# Altium PCB 20bit_40MS_ADC_DIOT.PcbDoc (part 6 of 8)
Units mm, origin at the board's own origin, x right, y up, seen from the top; angles counter-clockwise.
Board outline 222.63 x 100.1 mm, 6 copper layers (L1, L2, L3, L4, L5, L6), stack 2.522 mm thick; 616 components, 374 nets, 2097 pads, 984 vias.
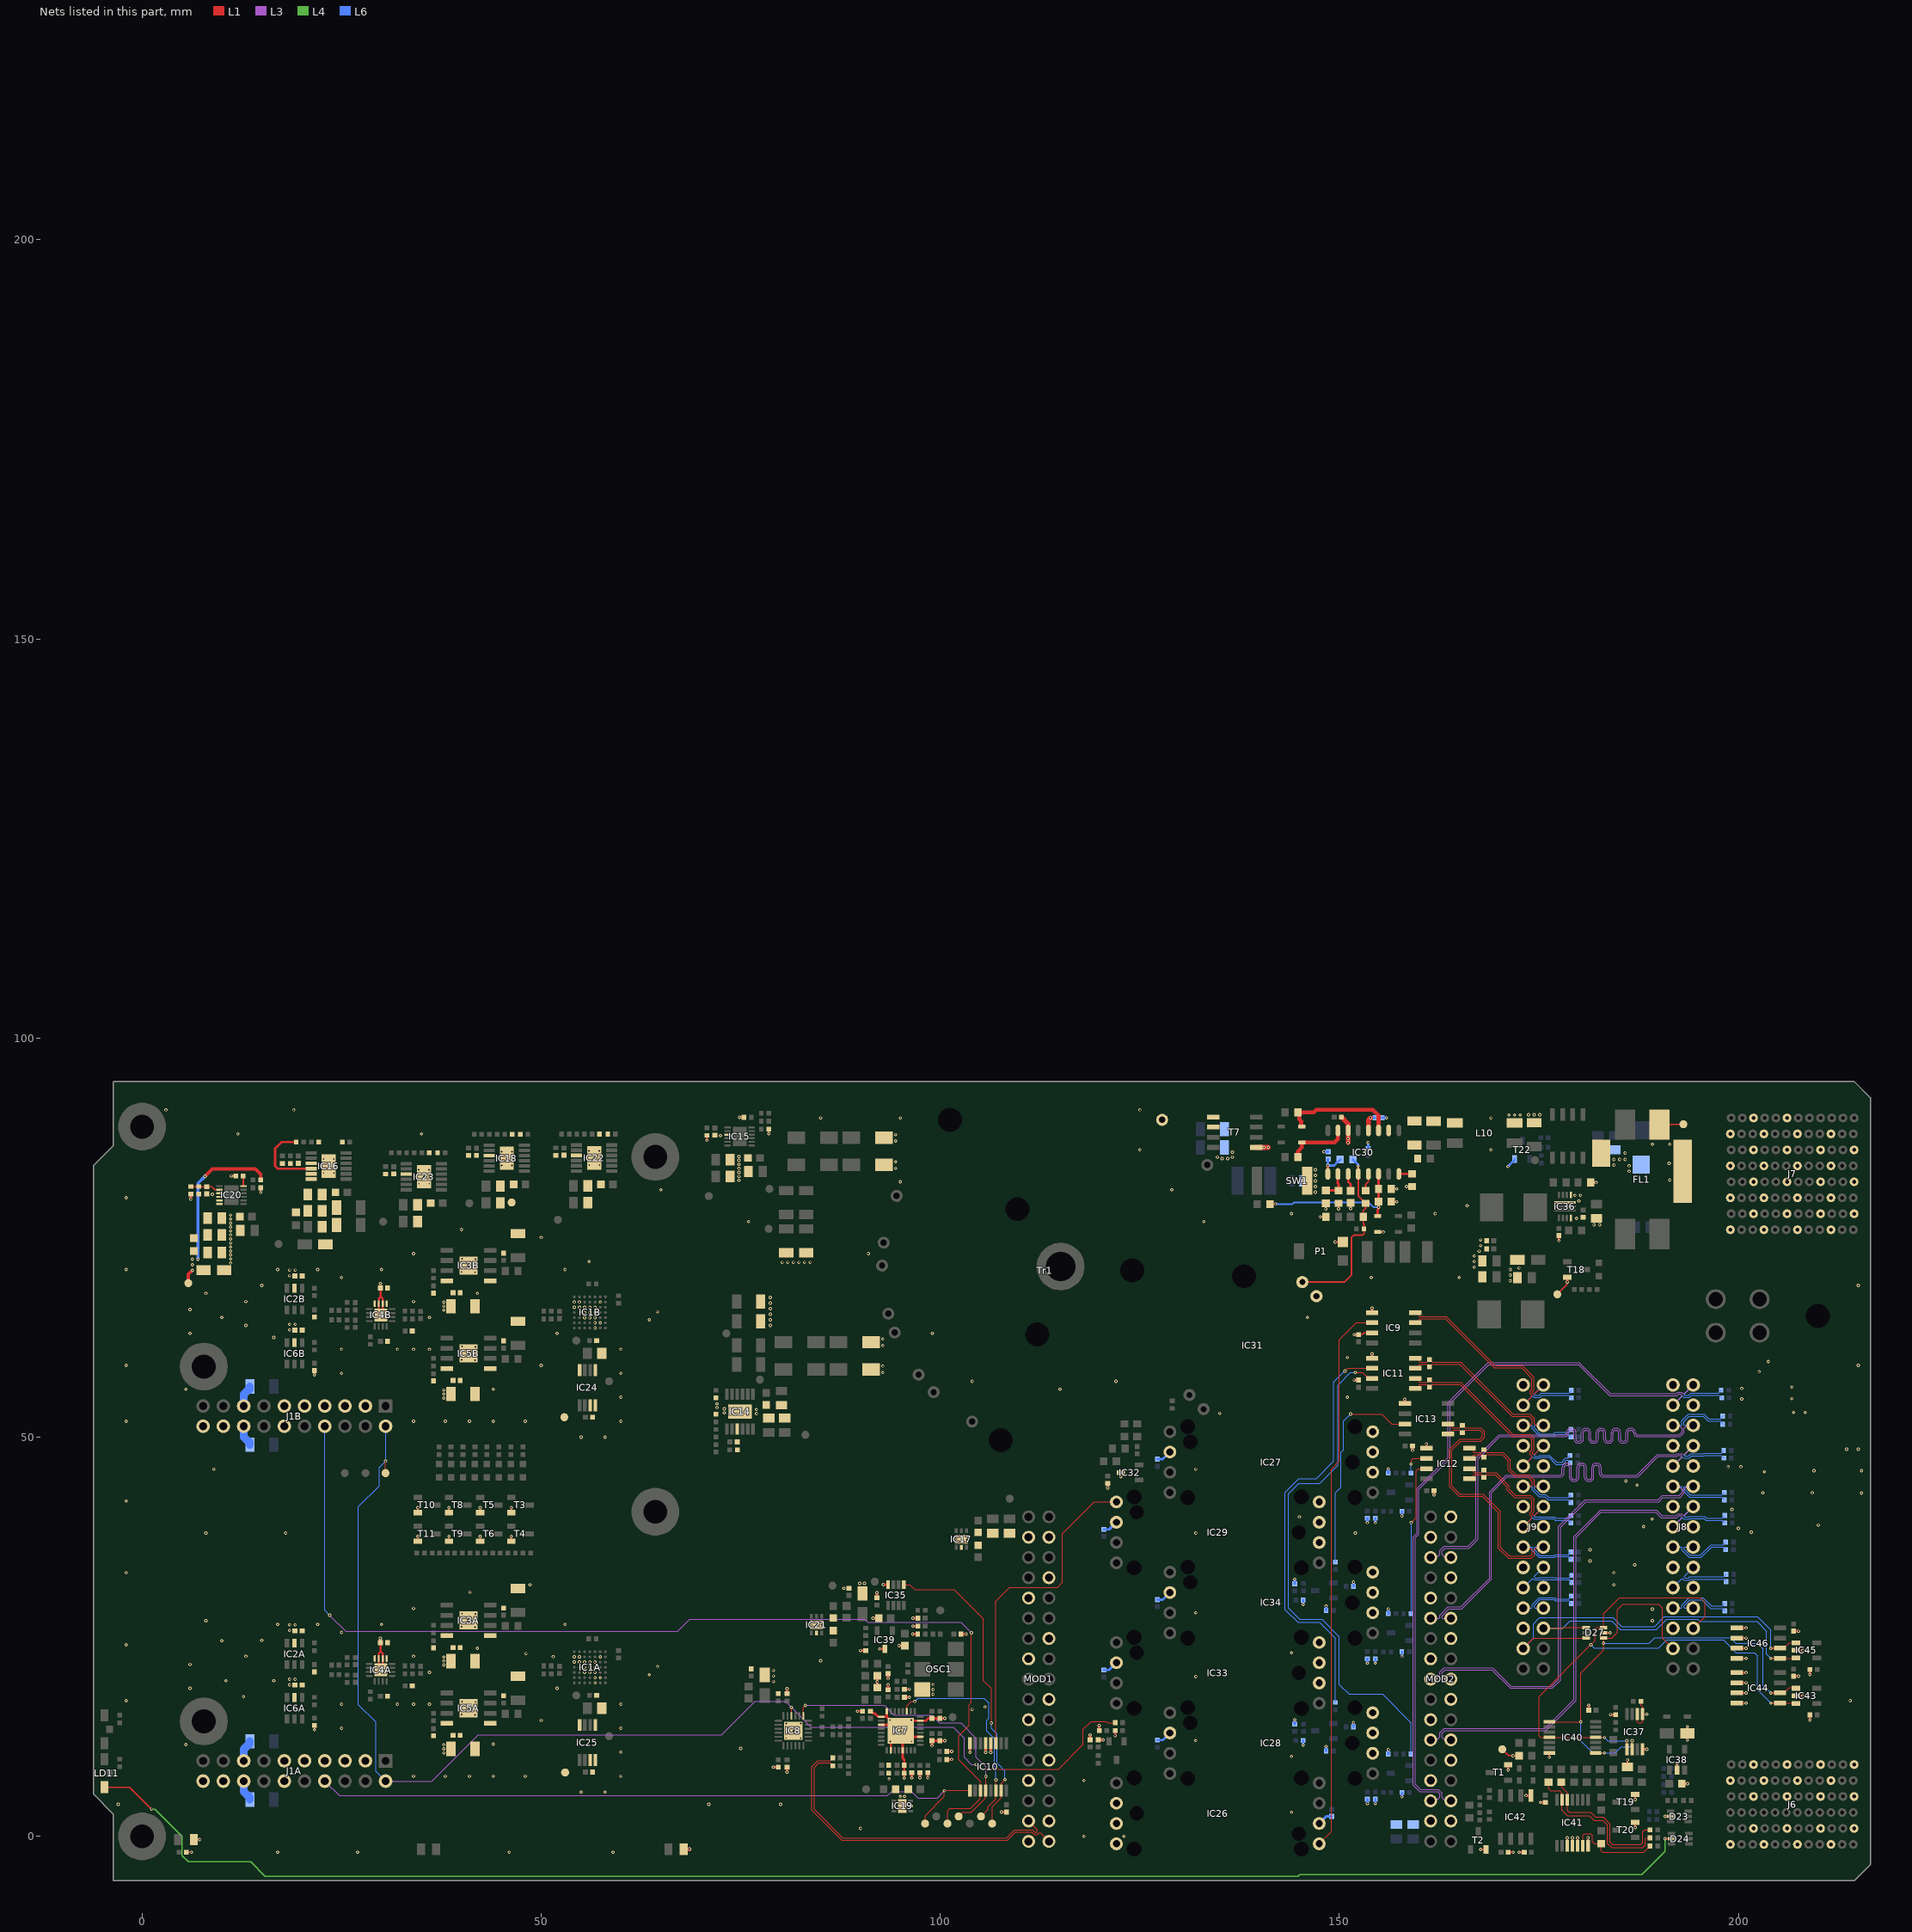
[diagram p8: the nets of this part, all layers, seen from the top]

## Via types
v1: diameter 0.4, hole 0.2, L1 to L6, tented both sides, 984 vias

## Nets (pads, with @x,y where several pads share a name; then routed paths per layer and width w, separated by ;. In a path a pad name is that pad's centre, name@x,y a point inside that pad or via, vN(x,y) a via of type N, cw(c..) or ccw(c..) an arc to the next point about the centre after c; other vN are vias at no path point) (continued)
CSn_2: IC10.3 IC29.8 | length 41.6
  L1 w0.125: IC10.3@106.975,11.65 106.975,29.475 108.7,31.2 114.7,31.2 115.3,31.8 115.3,37.9 119.285,41.885 IC29.8@122.068,41.885
CSn_AD4350: B9.1 IC7.3 IC10.14 | length 27.2
  L1 w0.125: IC7.3@95.8,15.675 95.8,16.3 96.4,16.9 v1(96.8,16.9) ; B9.1@105.1,2.5 106,3.4 106,3.7 106.975,4.675 IC10.14@106.975,5.75 v1(106.975,7.075)
  L6 w0.125: v1(96.8,16.9) 97.2,17.3 105.5,17.3 106.1,16.7 106.1,14.8 105.8,14.5 105.8,13.2 106.8,12.2 106.8,8.7 106.975,8.525 v1(106.975,7.075)
CSn_AD9508: B10.1 IC8.1 IC10.12 | length 36.9
  L1 w0.125: IC8.1@82.85,15.1 82.85,16.15 v1(83.1,16.4) ; B10.1@102.3,2.5 102.8,3 103.9,3 105.675,4.775 IC10.12@105.675,5.75 105.7,5.775 v1(105.7,7.5)
  L3 w0.125: v1(83.1,16.4) 93,16.4 94.2,15.2 98.9,15.2 99.9,14.2 102.6,14.2 104.5,12.3 104.5,9.9 105.7,8.7 v1(105.7,7.5)
CSn_DAC: B11.1 IC10.15 IC35.5 | length 39.2
  L1 w0.125: IC35.5@95.45,31.5 IC35.5@95.425,31.525 96.175,31.525 96.8,30.9 101.731,30.9 105.4,27.231 105.4,19.5 106.4,18.5 v1(106.4,14.2) ; B11.1@106.5,1.6 106.5,3.7 107.625,4.825 IC10.15@107.625,5.75 107.625,6.625 v1(108.1,7.1)
  L6 w0.125: v1(106.4,14.2) 106.4,13.5 107.1,12.8 107.1,9.2 108.1,8.2 v1(108.1,7.1)
CSn_LNA_CH_A: B4B.1 IC10.11 J1B.8 | length 135.4
  L1 w0.125: B4B.1@100.9,1.6 100.9,3.2 101.2,3.5 103.8,3.5 105.025,4.725 IC10.11@105.025,5.75 105.025,6.875 102.3,9.6 102.3,12.6 103.6,13.9 103.6,16.5 103.9,16.8 v1(103.9,25.5)
  L3 w0.125: v1(23.5,27.7) 25.5,25.7 67.1,25.7 68.6,27.2 90.5,27.2 90.9,26.8 102.6,26.8 v1(103.9,25.5)
  L6 w0.125: J1B.8@22.892,51.368 22.892,28.308 v1(23.5,27.7)
CSn_LNA_CH_B: B4A.1 IC10.9 J1A.8 | length 87.6
  L1 w0.125: B4A.1@98.1,1.6 98.1,2.6 100.5,5 v1(100.5,5.7) 100.55,5.75 IC10.9@103.725,5.75
  L3 w0.125: J1A.8@22.892,6.918 24.71,5.1 93.4,5.1 93.9,5.6 96.4,5.6 97.2,4.8 99.6,4.8 v1(100.5,5.7)
DIOT_CLK_N: C29.1 MOD1.3 | length 39.7
  L1 w0.125: C29.1@86.55,8.825 86.303,9.073 86.303,9.115 86.229,9.188 85.875,9.188 84.788,9.188 84.2,8.6 84.2,3.4 87.8,-0.2 108.313,-0.2 109.313,0.8 111.6,0.8 111.898,0.502 112.001,0.502 112.1,0.6 112.1,0.884 MOD1.3@111.068,1.915
DIOT_CLK_P: C28.1 MOD1.2 | length 40.8
  L1 w0.125: C28.1@86.55,9.825 86.303,9.578 86.303,9.535 86.229,9.462 85.988,9.462 84.675,9.462 83.926,8.713 83.926,3.287 87.687,-0.474 108.426,-0.474 109.426,0.526 111.487,0.526 111.784,0.228 112.115,0.228 112.293,0.407 112.576,0.407 MOD1.2@113.608,-0.625
DIOT_CSn_0: IC12.7 R98.2 | length 19.6
  L1 w0.125: v1(159,39.3) 159.6,39.9 159.6,45.8 159.865,46.065 IC12.7@160.9,46.065
  L6 w0.125: R98.2@158.97,27.9 159,27.93 v1(159,39.3)
DIOT_CSn_1: IC12.6 R82.2 | length 3.6
  L1 w0.125: v1(158.97,46.63) 158.999,46.659 158.999,47.099 159.235,47.335 IC12.6@160.9,47.335
  L6 w0.125: R82.2@158.97,45.5 v1(158.97,46.63)
DIOT_CSn_2: IC13.7 R90.2 | length 26.6
  L1 w0.125: v1(151.4,52.9) 155.3,52.9 156.535,51.665 IC13.7@158.2,51.665
  L6 w0.125: R90.2@149.5,34.37 149.5,43 150.2,43.7 150.2,48.1 150.5,48.4 150.5,52 v1(151.4,52.9)
DIOT_SPI_CLK: IC11.7 R89.2 | length 66
  L1 w0.125: v1(152,58.1) 152.89,58.1 153.388,57.603 153.863,57.602 IC11.7@154.1,57.365
  L6 w0.125: v1(152,58.1) 151.4,58.1 149.8,56.5 149.8,46.482 147.593,44.275 147.575,44.275 147.5,44.2 144.9,44.2 143.6,42.9 143.6,28.6 145,27.2 147.8,27.2 150,25 150,19 151.2,17.8 155.4,17.8 158.97,14.23 R89.2@158.97,10.3
DIOT_SPI_MISO: IC9.2 IC26.8 | length 69.2
  L1 w0.125: IC26.8@147.468,-0.935 149,0.597 149,46 150,47 150,62.2 152.135,64.335 IC9.2@154.1,64.335
DIOT_SPI_MOSI: IC11.6 R97.2 | length 53.7
  L1 w0.125: v1(150.7,58.3) 151.035,58.635 IC11.6@154.1,58.635
  L6 w0.125: R97.2@149.5,16.77 149.5,24.8 147.5,26.8 144.8,26.8 143.2,28.4 143.2,43.1 144.9,44.8 147.1,44.8 149.3,47 149.3,56.9 v1(150.7,58.3)
EEM0_I2C.SCL: D27.1 IC37.2 IC40.1 IC40.8 IC43.1 IC44.6 J8.27 | length 75.1
  L1 w0.125: IC40.1@176.3,14.35 v1(180.25,14.35) 180.25,20.45 183.1,23.3 v1(183.1,24.2) D27.1@183.1,24.85 184.1,24.85 184.8,25.55 184.8,28.4 185.5,29.1 190,29.1 190.5,28.6 190.5,24.815 J8.27@191.787,23.528 ; IC40.8@182.1,10.45 v1(183.2,10.45) ; IC37.2@186.675,10.9 v1(186.675,11.975) ; IC44.6@205.2,17.965 205.675,17.965 205.912,18.202 205.912,18.212 206.35,18.65 IC43.1@207.2,18.65
  L1 w0.2: v1(204.05,17.965) IC44.6@205.2,17.965
  L6 w0.125: v1(180.25,14.35) 180.25,11.95 181.75,10.45 v1(183.2,10.45) 184.55,10.45 185.3,11.2 186.4,11.2 186.675,11.475 v1(186.675,11.975) ; v1(183.1,24.2) 188.8,24.2 189.5,24.9 199,24.9 199.7,24.2 202.4,24.2 203.1,23.5 203.1,18.915 v1(204.05,17.965)
EEM0_I2C.SDA: D27.3 IC37.1 IC40.4 IC40.11 IC43.3 IC44.5 J8.26 | length 81.2
  L1 w0.125: v1(183.2,12.4) IC40.11@182.1,12.4 IC40.4@176.3,12.4 175.2,12.4 175,12.6 175,17.5 v1(181.5,24) 182,24.5 182,25.9 182.25,26.15 D27.3@183.1,26.15 183.1,27.9 185.1,29.9 195.2,29.9 195.8,29.3 195.8,27.541 J8.26@194.327,26.068 ; IC37.1@186.025,10.9 v1(186.025,11.975) ; IC44.5@205.2,16.695 207.145,16.695 IC43.3@207.2,16.75
  L1 w0.2: v1(204.05,16.695) IC44.5@205.2,16.695
  L6 w0.125: v1(181.5,24) 181.9,23.6 190,23.6 191,24.6 198.1,24.6 199.7,23 202,23 202.4,22.6 202.4,18.345 v1(204.05,16.695) ; v1(183.2,12.4) 183.625,11.975 v1(186.025,11.975)
EEM_IO.LVDS_N0: J8.3 MOD2.29 R161.2 | length 96.6
  L3 w0.13: MOD2.29@163.968,4.455 163.768,4.656 163.067,4.656 162.823,4.9 162.823,5.43 162.476,5.776 162.403,5.849 160.151,5.849 159.5,6.5 159.5,37.4 159.949,37.849 159.949,43.449 163.849,47.349 163.849,54.249 168.7,59.1 179.948,59.1 183.848,55.2 192.3,55.2 192.5,55.4 192.759,55.4 192.88,55.28 192.88,55.101 J8.3@191.787,54.008
  L6 w0.125: J8.3@191.787,54.008 192.899,55.121 192.92,55.121 192.926,55.126 193.029,55.126 193.172,54.983 193.87,54.983 194.147,55.26 197.592,55.26 197.665,55.187 197.665,55.155 R161.2@197.893,54.928
EEM_IO.LVDS_N1: J8.6 MOD2.5 R162.2 | length 64.1
  L3 w0.13: MOD2.5@163.968,34.935 163.848,35.056 163.067,35.056 162.823,35.3 162.823,35.723 163.2,36.1 166.252,36.1 167.349,37.197 167.349,47.297 170.107,50.054 178,50.054 178.19,50.054 ccw(c178.19,50.576) 178.711,50.576 178.711,50.582 cw(c178.984,50.582) 178.984,50.854 179.121,50.854 cw(c179.121,50.582) 179.393,50.582 179.393,49.776 ccw(c179.915,49.776) 179.915,49.254 180.052,49.254 ccw(c180.052,49.776) 180.573,49.776 180.573,50.582 cw(c180.846,50.582) 180.846,50.854 180.983,50.854 cw(c180.983,50.582) 181.255,50.582 181.255,49.776 ccw(c181.777,49.776) 181.777,49.254 181.914,49.254 ccw(c181.914,49.776) 182.435,49.776 182.435,50.582 cw(c182.708,50.582) 182.708,50.854 182.845,50.854 cw(c182.845,50.582) 183.117,50.582 183.117,49.776 ccw(c183.639,49.776) 183.639,49.254 183.776,49.254 ccw(c183.776,49.776) 184.297,49.776 184.297,50.582 cw(c184.57,50.582) 184.57,50.854 184.707,50.854 cw(c184.707,50.582) 184.979,50.582 184.979,49.776 ccw(c185.501,49.776) 185.501,49.254 185.638,49.254 ccw(c185.638,49.776) 186.159,49.776 186.159,50.582 cw(c186.432,50.582) 186.432,50.854 186.569,50.854 cw(c186.569,50.582) 186.841,50.582 186.841,50.576 ccw(c187.363,50.576) 187.363,50.054 188.1,50.054 192.658,50.054 193.181,50.578 193.181,51.103 193.426,51.348 194.207,51.348 J8.6@194.327,51.468
  L6 w0.125: J8.6@194.327,51.468 193.255,51.468 193.182,51.541 193.182,51.982 193.8,52.6 195.577,52.6 196.18,51.997 197.719,51.997 197.792,51.923 197.792,51.853 R162.2@198.02,51.626
EEM_IO.LVDS_N2: J8.9 MOD2.11 R163.2 | length 64
  L3 w0.13: MOD2.11@163.968,27.315 162.899,27.315 162.823,27.391 162.823,27.591 163.711,28.48 165.303,28.48 169.049,32.226 169.049,43.049 171,45 177.435,45 177.625,45 ccw(c177.625,45.522) 178.147,45.522 178.147,46.205 cw(c178.42,46.205) 178.42,46.478 178.556,46.478 cw(c178.556,46.205) 178.829,46.205 178.829,44.991 ccw(c179.351,44.991) 179.351,44.469 179.487,44.469 ccw(c179.487,44.991) 180.009,44.991 180.009,46.205 cw(c180.282,46.205) 180.282,46.478 180.418,46.478 cw(c180.418,46.205) 180.691,46.205 180.691,44.991 ccw(c181.213,44.991) 181.213,44.469 181.349,44.469 ccw(c181.349,44.991) 181.871,44.991 181.871,46.205 cw(c182.144,46.205) 182.144,46.478 182.28,46.478 cw(c182.28,46.205) 182.553,46.205 182.553,45.522 ccw(c183.075,45.522) 183.075,45 184.797,45 187.352,45 187.498,45.146 189.932,47.58 192.226,47.58 192.346,47.7 192.839,47.7 192.915,47.624 192.915,47.516 J8.9@191.787,46.388
  L6 w0.125: J8.9@191.787,46.388 192.917,47.518 193.02,47.518 193.157,47.382 193.888,47.382 194.149,47.642 195.679,47.642 195.749,47.712 197.871,47.712 197.944,47.638 197.944,47.611 R163.2@198.172,47.384
EEM_IO.LVDS_N3: J8.12 MOD2.17 R164.2 | length 63.3
  L3 w0.13: MOD2.17@163.968,19.695 163.848,19.816 163.067,19.816 162.823,20.06 162.823,20.483 163.2,20.86 169.088,20.86 171.397,18.551 176.703,18.551 177.7,19.548 177.7,38.7 180.9,41.9 190.02,41.9 190.555,42.434 192.658,42.434 193.181,42.958 193.181,43.483 193.426,43.728 194.207,43.728 J8.12@194.327,43.848
  L6 w0.125: J8.12@194.327,43.848 193.255,43.848 193.182,43.775 193.182,43.546 193.97,42.758 197.387,42.758 197.397,42.748 197.922,42.748 197.995,42.821 197.995,42.844 R164.2@198.223,43.071
EEM_IO.LVDS_N4: J8.15 MOD2.23 R167.2 | length 64.7
  L3 w0.13: MOD2.23@163.968,12.075 163.848,12.196 163.067,12.196 162.823,12.44 162.823,12.863 163.2,13.24 175.892,13.24 179.649,16.997 179.649,37.449 182.8,40.6 189.6,40.6 190.3,39.9 192.24,39.9 192.5,40.16 192.759,40.16 192.88,40.04 192.88,39.861 J8.15@191.787,38.768
  L6 w0.125: J8.15@191.787,38.768 192.917,39.898 193.02,39.898 193.174,39.745 193.871,39.745 193.907,39.781 195.719,39.781 195.911,39.589 197.973,39.589 198.046,39.516 198.046,39.483 R167.2@198.274,39.256
EEM_IO.LVDS_N5: J8.18 R168.2 | length 7.6
  L6 w0.125: J8.18@194.327,36.228 193.255,36.228 193.182,36.155 193.182,35.953 193.93,35.205 195.235,35.205 196.565,36.535 198.1,36.535 198.173,36.608 198.173,36.641 R168.2@198.401,36.868
EEM_IO.LVDS_N6: J8.21 R169.2 | length 7.4
  L6 w0.125: J8.21@191.787,31.148 192.908,32.27 193.012,32.27 193.165,32.116 193.863,32.116 193.974,32.228 198.151,32.228 198.224,32.155 198.224,32.117 R169.2@198.451,31.89
EEM_IO.LVDS_N7: J8.24 R170.2 | length 7.4
  L6 w0.125: J8.24@194.327,28.608 193.255,28.608 193.182,28.681 193.182,28.884 193.93,29.631 195.417,29.631 196.483,28.565 197.973,28.565 198.046,28.492 198.046,28.46 R170.2@198.274,28.232
EEM_IO.LVDS_N8: IC9.7 J9.3 R171.2 | length 28.9
  L1 w0.125: IC9.7@159.5,64.335 159.761,64.335 159.998,64.572 159.998,64.76 160.071,64.833 163.267,64.833 169.4,58.7 172.8,58.7 174.126,57.374 174.126,56.017 173.905,55.796 173.905,55.465 174.085,55.285 174.085,55.076 J9.3@173.017,54.007
  L6 w0.125: J9.3@173.017,54.007 174.147,55.137 174.25,55.137 174.397,54.991 175.108,54.991 175.377,55.26 176.267,55.26 176.28,55.273 178.745,55.273 178.818,55.199 178.818,55.155 R171.2@179.046,54.928
EEM_IO.LVDS_N9: IC11.4 J9.6 R26.1 R172.2 | length 26.9
  L1 w0.125: IC11.4@159.5,59.905 159.761,59.905 159.998,59.668 159.998,59.48 160.071,59.407 160.979,59.407 161.053,59.48 161.053,59.513 161.28,59.74 R26.1@161.3,59.74 161.32,59.74 161.548,59.513 161.548,59.48 161.621,59.407 165.193,59.407 171.726,52.874 173.913,52.874 174.424,52.364 174.424,51.7 174.657,51.467 J9.6@175.557,51.467
  L6 w0.125: J9.6@175.557,51.467 174.485,51.467 174.412,51.394 174.412,51.145 175.127,50.43 176.834,50.43 177.025,50.62 178.72,50.62 178.793,50.694 178.793,50.738 R172.2@179.02,50.965
EEM_IO.LVDS_N10: IC11.1 J9.9 R25.2 R173.2 | length 29.4
  L1 w0.125: IC11.1@159.5,56.095 159.761,56.095 159.998,56.332 159.998,56.52 160.071,56.593 160.979,56.593 161.053,56.52 161.053,56.487 161.28,56.26 R25.2@161.3,56.26 161.32,56.26 161.548,56.487 161.548,56.52 161.621,56.593 165.12,56.593 171.613,50.1 173.8,50.1 174.126,49.774 174.126,48.397 173.905,48.176 173.905,47.845 174.085,47.665 174.085,47.456 J9.9@173.017,46.387
  L6 w0.125: J9.9@173.017,46.387 174.147,47.517 174.25,47.517 174.397,47.371 175.108,47.371 175.22,47.482 176.234,47.482 177.141,46.575 178.084,46.575 178.311,46.802 178.311,47.021 178.421,47.132 178.618,47.132 178.691,47.059 178.691,47.027 R173.2@178.919,46.8
EEM_IO.LVDS_N11: IC12.4 J9.12 R28.1 R174.2 | length 19.3
  L1 w0.125: IC12.4@166.3,48.605 166.561,48.605 166.798,48.368 166.798,48.18 166.871,48.107 167.779,48.107 167.853,48.18 167.853,48.213 168.08,48.44 R28.1@168.1,48.44 168.12,48.44 168.348,48.213 168.348,48.18 168.421,48.107 170.48,48.107 171.4,47.187 171.4,46 172.126,45.274 173.713,45.274 174.424,44.564 174.424,44 174.577,43.847 J9.12@175.557,43.847
  L6 w0.125: J9.12@175.557,43.847 174.485,43.847 174.412,43.774 174.412,43.525 175.127,42.81 175.84,42.81 176.233,42.416 178.707,42.416 178.78,42.489 178.78,42.534 R174.2@179.008,42.761
EEM_IO.LVDS_N12: IC12.1 J9.15 R27.2 R175.2 | length 20.8
  L1 w0.125: IC12.1@166.3,44.795 166.561,44.795 166.798,45.032 166.798,45.22 166.871,45.293 167.779,45.293 167.853,45.22 167.853,45.187 168.08,44.96 R27.2@168.1,44.96 168.12,44.96 168.348,45.187 168.348,45.22 168.421,45.293 169.507,45.293 171,43.8 171,43.387 171.96,42.426 173.834,42.426 174.126,42.134 174.126,40.777 173.905,40.556 173.905,40.225 174.085,40.045 174.085,39.836 J9.15@173.017,38.767
  L6 w0.125: J9.15@173.017,38.767 174.147,39.897 174.25,39.897 174.397,39.751 175.108,39.751 175.137,39.78 176.839,39.78 177.031,39.588 178.72,39.588 178.793,39.515 178.793,39.483 R175.2@179.02,39.256
EEM_IO.LVDS_N13: IC13.1 J9.18 R29.2 R176.2 | length 40.6
  L1 w0.125: IC13.1@163.6,50.395 163.861,50.395 164.098,50.632 164.098,50.82 164.171,50.893 165.079,50.893 165.153,50.82 165.153,50.787 165.38,50.56 165.42,50.56 165.753,50.893 167.607,50.893 167.9,50.6 167.9,50.1 167.574,49.774 165.087,49.774 163.826,48.513 163.826,43.787 165.013,42.6 167.9,42.6 169.926,40.574 169.926,36.087 171.187,34.826 174.063,34.826 174.424,35.187 174.424,35.9 174.619,36.096 175.425,36.096 J9.18@175.557,36.227
  L6 w0.125: J9.18@175.557,36.227 174.485,36.227 174.412,36.154 174.412,35.905 175.127,35.19 176.879,35.19 176.981,35.291 178.72,35.291 178.793,35.365 178.793,35.396 R176.2@179.02,35.624
EEM_IO.LVDS_N14: J9.21 R177.2 | length 6.8
  L6 w0.125: J9.21@173.017,31.147 174.147,32.277 174.25,32.277 174.397,32.131 175.108,32.131 175.137,32.16 176.957,32.16 176.992,32.125 178.799,32.125 178.873,32.052 178.873,31.961 R177.2@179.046,31.788
EEM_IO.LVDS_N15: J9.24 R144.1 | length 6.6
  L6 w0.125: J9.24@175.557,28.607 174.485,28.607 174.412,28.68 174.412,28.929 175.127,29.645 176.884,29.645 177.027,29.502 178.77,29.502 178.844,29.428 178.844,29.374 R144.1@179.071,29.147
EEM_IO.LVDS_P0: J8.2 MOD2.30 R145.2 | length 96.9
  L3 w0.13: MOD2.30@161.428,4.455 161.628,4.656 162.329,4.656 162.573,4.9 162.573,5.327 162.3,5.6 160.048,5.6 159.624,6.024 159.251,6.397 159.251,37.503 159.7,37.952 159.7,43.552 163.6,47.452 163.6,54.352 168.597,59.349 180.051,59.349 183.951,55.449 192.197,55.449 192.397,55.649 192.862,55.649 193.056,55.456 193.234,55.456 J8.2@194.327,56.548
  L6 w0.125: J8.2@194.327,56.548 193.213,55.434 193.213,55.331 193.286,55.257 193.757,55.257 194.033,55.534 197.528,55.534 197.602,55.607 197.602,55.665 R145.2@197.829,55.893
EEM_IO.LVDS_P1: J8.5 MOD2.6 R146.2 | length 64.6
  L3 w0.13: MOD2.6@161.428,34.935 161.548,35.056 162.329,35.056 162.573,35.3 162.573,35.826 163.097,36.349 166.149,36.349 167.1,37.3 167.1,47.4 170.003,50.303 178,50.303 178.19,50.303 ccw(c178.19,50.576) 178.462,50.576 178.462,50.582 cw(c178.984,50.582) 178.984,51.103 179.121,51.103 cw(c179.121,50.582) 179.642,50.582 179.642,49.776 ccw(c179.915,49.776) 179.915,49.503 180.052,49.503 ccw(c180.052,49.776) 180.324,49.776 180.324,50.582 cw(c180.846,50.582) 180.846,51.103 180.983,51.103 cw(c180.983,50.582) 181.504,50.582 181.504,49.776 ccw(c181.777,49.776) 181.777,49.503 181.914,49.503 ccw(c181.914,49.776) 182.186,49.776 182.186,50.582 cw(c182.708,50.582) 182.708,51.103 182.845,51.103 cw(c182.845,50.582) 183.366,50.582 183.366,49.776 ccw(c183.639,49.776) 183.639,49.503 183.776,49.503 ccw(c183.776,49.776) 184.048,49.776 184.048,50.582 cw(c184.57,50.582) 184.57,51.103 184.707,51.103 cw(c184.707,50.582) 185.228,50.582 185.228,49.776 ccw(c185.501,49.776) 185.501,49.503 185.638,49.503 ccw(c185.638,49.776) 185.91,49.776 185.91,50.582 cw(c186.432,50.582) 186.432,51.103 186.569,51.103 cw(c186.569,50.582) 187.09,50.582 187.09,50.576 ccw(c187.363,50.576) 187.363,50.303 188.1,50.303 192.555,50.303 192.932,50.681 192.932,51.103 192.688,51.348 191.907,51.348 J8.5@191.787,51.468
  L6 w0.125: J8.5@191.787,51.468 192.859,51.468 192.908,51.518 192.908,52.095 193.687,52.874 195.69,52.874 196.294,52.271 197.719,52.271 197.792,52.344 197.792,52.414 R146.2@198.02,52.642
EEM_IO.LVDS_P2: J8.8 MOD2.12 R147.2 | length 64.4
  L3 w0.13: MOD2.12@161.428,27.315 162.497,27.315 162.573,27.391 162.573,27.694 163.608,28.729 165.2,28.729 168.8,32.329 168.8,43.152 170.897,45.249 177.435,45.249 177.625,45.249 ccw(c177.625,45.522) 177.898,45.522 177.898,46.205 cw(c178.42,46.205) 178.42,46.727 178.556,46.727 cw(c178.556,46.205) 179.078,46.205 179.078,44.991 ccw(c179.351,44.991) 179.351,44.718 179.487,44.718 ccw(c179.487,44.991) 179.76,44.991 179.76,46.205 cw(c180.282,46.205) 180.282,46.727 180.418,46.727 cw(c180.418,46.205) 180.94,46.205 180.94,44.991 ccw(c181.213,44.991) 181.213,44.718 181.349,44.718 ccw(c181.349,44.991) 181.622,44.991 181.622,46.205 cw(c182.144,46.205) 182.144,46.727 182.28,46.727 cw(c182.28,46.205) 182.802,46.205 182.802,45.522 ccw(c183.075,45.522) 183.075,45.249 184.797,45.249 187.249,45.249 189.829,47.829 192.123,47.829 192.243,47.949 192.942,47.949 193.091,47.8 193.199,47.8 J8.8@194.327,48.928
  L6 w0.125: J8.8@194.327,48.928 193.197,47.798 193.197,47.729 193.27,47.655 193.775,47.655 194.035,47.916 195.566,47.916 195.635,47.985 197.846,47.985 197.919,48.059 197.919,48.096 R147.2@198.147,48.324
EEM_IO.LVDS_P3: J8.11 MOD2.18 R148.2 | length 63.7
  L3 w0.13: MOD2.18@161.428,19.695 161.548,19.816 162.329,19.816 162.573,20.06 162.573,20.586 163.097,21.109 169.191,21.109 171.3,19 171.5,18.8 176.6,18.8 177.451,19.651 177.451,38.803 180.797,42.149 189.917,42.149 190.452,42.683 192.555,42.683 192.932,43.061 192.932,43.483 192.688,43.728 191.907,43.728 J8.11@191.787,43.848
  L6 w0.125: J8.11@191.787,43.848 192.859,43.848 192.908,43.799 192.908,43.433 193.857,42.484 197.273,42.484 197.283,42.474 197.922,42.474 197.995,42.401 197.995,42.379 R148.2@198.223,42.151
EEM_IO.LVDS_P4: J8.14 MOD2.24 R149.2 | length 65.1
  L3 w0.13: MOD2.24@161.428,12.075 161.548,12.196 162.329,12.196 162.573,12.44 162.573,12.966 163.097,13.489 175.789,13.489 179.4,17.1 179.4,37.552 182.697,40.849 189.703,40.849 190.403,40.149 192.137,40.149 192.397,40.409 192.862,40.409 193.056,40.216 193.234,40.216 J8.14@194.327,41.308
  L6 w0.125: J8.14@194.327,41.308 193.214,40.195 193.214,40.092 193.287,40.019 193.758,40.019 193.794,40.055 195.833,40.055 196.025,39.863 197.973,39.863 198.046,39.936 198.046,39.968 R149.2@198.274,40.196
EEM_IO.LVDS_P5: J8.17 R150.2 | length 8.1
  L6 w0.125: J8.17@191.787,36.228 192.859,36.228 192.908,36.179 192.908,35.839 193.816,34.931 195.348,34.931 196.678,36.261 198.1,36.261 198.173,36.188 198.173,36.156 R150.2@198.401,35.928
EEM_IO.LVDS_P6: J8.20 R151.2 | length 7.2
  L6 w0.125: J8.20@194.327,33.688 193.205,32.567 193.205,32.463 193.279,32.39 193.749,32.39 193.861,32.502 198.151,32.502 198.224,32.575 198.224,32.602 R151.2@198.451,32.83
EEM_IO.LVDS_P7: J8.23 R152.2 | length 7.8
  L6 w0.125: J8.23@191.787,28.608 192.859,28.608 192.908,28.658 192.908,28.997 193.816,29.905 195.53,29.905 196.597,28.839 197.973,28.839 198.046,28.912 198.046,28.945 R152.2@198.274,29.172
EEM_IO.LVDS_P8: IC9.8 J9.2 R188.2 | length 28.9
  L1 w0.125: IC9.8@159.5,65.605 159.761,65.605 159.998,65.368 159.998,65.18 160.071,65.107 163.38,65.107 169.513,58.974 172.913,58.974 174.4,57.487 174.4,55.904 174.179,55.682 174.179,55.579 174.279,55.479 174.489,55.479 J9.2@175.557,56.547
  L6 w0.125: J9.2@175.557,56.547 174.427,55.417 174.427,55.314 174.5,55.241 175.005,55.241 175.274,55.51 176.163,55.51 176.176,55.523 178.745,55.523 178.818,55.596 178.818,55.64 R188.2@179.046,55.867
EEM_IO.LVDS_P9: IC11.3 J9.5 R26.2 R189.2 | length 26.9
  L1 w0.125: IC11.3@159.5,58.635 159.761,58.635 159.998,58.872 159.998,59.06 160.071,59.133 160.979,59.133 161.053,59.06 161.053,59.027 161.28,58.8 R26.2@161.3,58.8 161.32,58.8 161.548,59.027 161.548,59.06 161.621,59.133 165.08,59.133 171.613,52.6 173.8,52.6 174.15,52.25 174.15,51.7 173.917,51.467 J9.5@173.017,51.467
  L6 w0.125: J9.5@173.017,51.467 174.089,51.467 174.162,51.394 174.162,51.041 175.024,50.18 176.938,50.18 177.129,50.37 178.72,50.37 178.793,50.297 178.793,50.253 R189.2@179.02,50.025
EEM_IO.LVDS_P10: IC11.2 J9.8 R25.1 R190.2 | length 29.5
  L1 w0.125: IC11.2@159.5,57.365 159.761,57.365 159.998,57.128 159.998,56.94 160.071,56.867 160.979,56.867 161.053,56.94 161.053,56.973 161.28,57.2 R25.1@161.3,57.2 161.32,57.2 161.548,56.973 161.548,56.94 161.621,56.867 165.233,56.867 171.726,50.374 173.913,50.374 174.4,49.887 174.4,48.284 174.179,48.062 174.179,47.959 174.279,47.859 174.489,47.859 J9.8@175.557,48.927
  L6 w0.125: J9.8@175.557,48.927 174.427,47.797 174.427,47.694 174.5,47.621 175.005,47.621 175.116,47.732 176.338,47.732 177.245,46.825 177.98,46.825 178.061,46.906 178.061,47.125 178.318,47.382 178.605,47.382 178.678,47.455 178.678,47.492 R190.2@178.906,47.719
EEM_IO.LVDS_P11: IC12.3 J9.11 R28.2 R156.2 | length 19.3
  L1 w0.125: IC12.3@166.3,47.335 166.561,47.335 166.798,47.572 166.798,47.76 166.871,47.833 167.779,47.833 167.853,47.76 167.853,47.727 168.08,47.5 R28.2@168.1,47.5 168.12,47.5 168.348,47.727 168.348,47.76 168.421,47.833 170.367,47.833 171.126,47.074 171.126,45.887 172.013,45 173.6,45 174.15,44.45 174.15,44 173.997,43.847 J9.11@173.017,43.847
  L6 w0.125: J9.11@173.017,43.847 174.089,43.847 174.162,43.774 174.162,43.421 175.024,42.56 175.736,42.56 176.13,42.166 178.707,42.166 178.78,42.093 178.78,42.049 R156.2@179.008,41.821
EEM_IO.LVDS_P12: IC12.2 J9.14 R27.1 R157.2 | length 20.8
  L1 w0.125: IC12.2@166.3,46.065 166.561,46.065 166.798,45.828 166.798,45.64 166.871,45.567 167.779,45.567 167.853,45.64 167.853,45.673 168.08,45.9 R27.1@168.1,45.9 168.12,45.9 168.348,45.673 168.348,45.64 168.421,45.567 169.62,45.567 171.274,43.913 171.274,43.5 172.074,42.7 173.947,42.7 174.4,42.247 174.4,40.664 174.179,40.442 174.179,40.339 174.279,40.239 174.489,40.239 J9.14@175.557,41.307
  L6 w0.125: J9.14@175.557,41.307 174.427,40.177 174.427,40.074 174.5,40.001 175.005,40.001 175.034,40.03 176.943,40.03 177.134,39.838 178.72,39.838 178.793,39.911 178.793,39.943 R157.2@179.02,40.17
EEM_IO.LVDS_P13: IC13.2 J9.17 R29.1 R158.2 | length 40.5
  L1 w0.125: IC13.2@163.6,51.665 163.861,51.665 164.098,51.428 164.098,51.24 164.171,51.167 165.079,51.167 165.153,51.24 165.153,51.273 165.38,51.5 165.42,51.5 165.753,51.167 167.72,51.167 168.174,50.713 168.174,49.987 167.687,49.5 165.2,49.5 164.1,48.4 164.1,43.9 165.126,42.874 168.013,42.874 170.2,40.687 170.2,36.2 171.3,35.1 173.95,35.1 174.15,35.3 174.15,35.9 173.954,36.096 173.149,36.096 J9.17@173.017,36.227
  L6 w0.125: J9.17@173.017,36.227 174.089,36.227 174.162,36.154 174.162,35.801 175.024,34.94 176.982,34.94 177.084,35.041 178.72,35.041 178.793,34.968 178.793,34.937 R158.2@179.02,34.709
EEM_IO.LVDS_P14: J9.20 R159.2 | length 6.6
  L6 w0.125: J9.20@175.557,33.687 174.427,32.557 174.427,32.454 174.5,32.381 175.005,32.381 175.034,32.41 177.061,32.41 177.096,32.375 178.799,32.375 178.873,32.448 178.873,32.529 R159.2@179.046,32.703
EEM_IO.LVDS_P15: J9.23 R143.1 | length 7
  L6 w0.125: J9.23@173.017,28.607 174.089,28.607 174.162,28.68 174.162,29.033 175.024,29.895 176.987,29.895 177.13,29.752 178.758,29.752 178.831,29.825 178.831,29.884 R143.1@179.059,30.112
GA0: IC41.6 R130.1 R180.2 | length 12.1
  L1 w0.125: IC41.6@180.5,-1.2 180.5,0.1 180.7,0.3 181.5,0.3 181.7,0.1 181.7,-0.7 181.9,-0.9 R180.2@182.8,-0.9 182.8,-1.8 183,-2 188.13,-2 188.683,-1.447 188.703,-1.447 188.93,-1.22 R130.1@188.93,-1.2
GA1: IC41.12 R131.1 R178.2 | length 18.9
  L1 w0.125: R178.2@177.8,6.8 177.8,6.2 178.55,5.45 IC41.12@178.55,4.6 178.55,3.25 178.8,3 181.5,3 182.1,2.4 183.03,2.4 183.9,1.53 183.9,-0.7 184.2,-1 187.8,-1 188,-0.8 188,0.6 188.2,0.8 R131.1@188.93,0.8 R131.1@188.93,0.82
GA2: IC41.13 R136.1 R165.2 | length 20.2
  L1 w0.125: R165.2@176.2,6.8 176.2,6 176.5,5.7 177.6,5.7 177.9,5.4 IC41.13@177.9,4.6 177.9,3.3 178.6,2.6 181.3,2.6 181.9,2 183,2 183.6,1.4 183.6,-0.9 184.1,-1.4 188,-1.4 188.3,-1.1 188.3,-0.3 188.4,-0.2 R136.1@188.93,-0.2 ; R136.1@188.93,-0.22 R136.1@188.93,-0.2 ; R136.1@188.93,-0.18 R136.1@188.93,-0.2
GND: B33.1 B34.1 B35.1 C5A.1 C5B.1 C6A.1 C6B.1 C7A.1 C7B.1 C8A.1 C8B.1 C10A.1 C10B.1 C11A.1 C11B.1 C12A.1 C12B.1 C13A.1 C13B.1 C14A.1 C14B.1 C16A.1 C16B.1 C17A.1 C17B.1 C18A.1 C18B.1 C19A.1 C19B.1 C21A.1 C21B.1 C22A.1 C22B.1 C23A.1 C23B.1 C24A.1 C24B.1 C25A.1 C25B.1 C30.1 C31.1 C32.1 C33.1 C34.1 C35.1 C36.2 C37.1 C38.1 C39.1 C40.1 C41.1 C42.1 C43.1 C44.1 C45.1 C46.1 C47.1 C48.1 C49.1 C50.1 C51.1 C52.1 C53.1 C54.1 C55.1 C58.1 C61.1 C62.1 C63.1 C64.1 C65.1 C66.1 C67.1 C68.1 C69.1 C70.1 C71.1 C72.1 C75.1 C76.2 C77.1 C78.1 C79.1 C80.1 C81.1 C82.1 C83.1 C84.1 C85.1 C86.1 C87.1 C88.1 C89.1 C90.2 C91.2 C94.2 C95.2 C96.2 C97.1 C98.1 C99.1 C100.1 C101.1 C102.1 C103.1 C104.1 C105.1 C106.1 C107.1 C108.1 C109.1 C110.1 C111.1 C112.1 C113.1 C114.1 C115.1 C116.1 C117.1 C118.1 C122.1 C123.1 C124.1 C127.1 C128.1 C148.1 C149.1 C154.1 C155.1 C156.1 C157.1 C175.2 C176.1 C177.1 C178.1 C183A.2 C183B.2 C184A.2 C184B.2 D5.2 D6.2 D15.1 D16.1 IC1A.B1 IC1A.B2 IC1A.B6 IC1A.C1 IC1A.C2 IC1A.C3 IC1A.C4 IC1A.C5 IC1A.D3 IC1A.D4 IC1A.D5 IC1A.E3 IC1A.E4 IC1A.E5 IC1A.F5 IC1A.F6 IC1A.G5 IC1B.B1 IC1B.B2 IC1B.B6 IC1B.C1 IC1B.C2 IC1B.C3 IC1B.C4 IC1B.C5 IC1B.D3 IC1B.D4 IC1B.D5 IC1B.E3 IC1B.E4 IC1B.E5 IC1B.F5 IC1B.F6 IC1B.G5 IC3A.9 IC3B.9 IC4A.13 IC4A.16 IC4B.13 IC4B.16 IC5A.9 IC5B.9 IC7.8 IC7.9 IC7.11 IC7.18 IC7.21 IC7.27 IC7.31 IC7.33 IC8.25 IC10.4 IC10.5 IC10.8 IC14.9 IC14.13 IC15.9 IC16.9 IC16.13 IC17.5 IC17.7 IC18.9 IC18.13 IC19.5 IC19.7 IC20.9 IC21.5 IC21.7 IC22.9 IC22.13 IC23.9 IC23.13 IC24.3 IC24.4 IC24.5 IC24.8 IC25.3 IC25.4 IC25.5 IC25.8 IC26.2 IC26.3 IC26.4 IC27.7 IC28.7 IC29.7 IC32.3 IC33.7 IC34.7 IC35.8 IC39.3 J1A.3 J1A.5 J1A.7 J1A.9 J1A.11 J1A.12 J1A.15 J1A.16 J1A.18 J1A.20 J1B.3 J1B.5 J1B.7 J1B.9 J1B.11 J1B.12 J1B.15 J1B.16 J1B.18 J1B.20 MOD1.1 MOD1.4 MOD1.7 MOD1.10 MOD1.13 MOD1.16 MOD1.19 MOD1.22 MOD1.25 MOD1.28 MOD1.31 MOD1.32 OSC1.3 R23.1 R32.1 R33.1 R34.1 R35.1 R39.1 R40.1 R41.1 R42.1 R44.1 R46.2 R47.1 R53.1 R58.1 R59.1 R60.1 R66.1 R72.1 R74.1 R75.1 R76.1 R78.1 R83.1 R84.1 R118.1 R126.1 R196.1 R199.2 T3.2 T4.2 T5.2 T6.2 T8.2 T9.2 T10.2 T11.2 | length 80.9
  L1 w0.2: v1(11.18,82.725) R58.1@11.73,82.725 ; v1(14.85,80.675) R46.2@14.85,81.225 ; v1(21.6,13.35) C18A.1@21.6,13.9 ; v1(21.6,57.8) C18B.1@21.6,58.35 ; T11.2@34.55,36.95 v1(34.55,37.58) ; T10.2@34.55,40.55 v1(34.55,41.18) ; T9.2@38.45,36.95 v1(38.45,37.58) ; T8.2@38.45,40.55 v1(38.45,41.18) ; T6.2@42.35,36.95 v1(42.35,37.58) ; T5.2@42.35,40.55 v1(42.35,41.18) ; T4.2@46.25,36.95 v1(46.25,37.58) ; T3.2@46.25,40.55 v1(46.25,41.18) ; v1(74.848,90.075) R34.1@75.398,90.075 ; v1(78.518,88.025) R199.2@78.518,88.575 ; v1(120.968,43.655) R118.1@120.968,44.205 ; v1(122.618,45.025) IC32.3@122.618,45.575
  L1 w0.3: v1(6.1,79.825) R59.1@6.1,80.455 ; v1(70.768,87.175) R35.1@70.768,87.805 ; v1(79.075,8.675) C37.1@79.7,8.675 ; v1(80.8,8.05) C41.1@80.8,8.675 ; C40.1@80.8,17.875 v1(80.8,18.5) ; v1(89.625,15.675) C31.1@90.25,15.675 ; v1(90.025,23.275) C177.1@90.65,23.275 ; C32.1@91.25,15.675 91.41,15.515 91.485,15.515 91.6,15.4 91.8,15.4 92.225,14.975 IC7.9@92.6,14.975 93.3,14.975 ; v1(91.575,27.325) C155.1@92.3,27.325 ; C157.1@92.05,29.875 v1(92.05,30.5) ; C46.1@92.1,18.625 C45.1@92.1,20.125 ; v1(92.425,23.475) IC39.3@93.05,23.475 ; IC7.11@92.6,13.975 94.3,13.975 93.3,14.975 ; v1(92.85,31.525) IC35.8@93.475,31.525 ; IC7.8@93.3,15.675 93.3,14.975 ; C30.1@93.45,18.375 v1(93.45,19) ; v1(93.45,19.75) C47.1@93.45,20.375 ; IC7.18@93.8,10.775 93.8,11.975 v1(95.05,13.225) ; v1(94.825,23.875) C178.1@95.55,23.875 ; v1(95.48,7.3) C54.1@95.48,7.925 C55.1@95.48,8.925 95.48,9.62 95.3,9.8 IC7.21@95.3,10.775 IC7.33@95.3,12.975 ; C34.1@95.5,17.425 v1(96.125,17.425) ; C33.1@95.5,18.425 v1(96.125,18.425) ; v1(96.43,7.33) R23.1@96.43,7.955 ; v1(96.555,25.325) R126.1@97.18,25.325 ; v1(96.575,26.325) C82.1@97.2,26.325 ; v1(96.575,27.325) C154.1@97.2,27.325 ; v1(97.45,7.35) C51.1@97.45,7.975 ; IC7.27@97.5,12.475 95.8,12.475 IC7.33@95.3,12.975 ; v1(98.45,7.35) C50.1@98.45,7.975 ; C44.1@98.79,12.135 C44.1@98.95,11.975 ; v1(98.95,11.35) C44.1@98.95,11.975 ; v1(100.575,11.975) C43.1@99.95,11.975 C44.1@98.95,11.975 ; v1(100.575,14.775) C35.1@99.95,14.775 C42.1@98.95,14.775 98.475,14.775 98.175,14.475 IC7.31@97.5,14.475 96.3,14.475 v1(95.05,13.225) ; C52.1@100.8,9.625 v1(101.425,9.625) ; C53.1@100.8,10.625 v1(101.425,10.625) ; C156.1@102.6,25.325 v1(103.225,25.325) ; v1(103.725,10.525) IC10.8@103.725,11.65 ; v1(105.675,10.525) IC10.5@105.675,11.65 ; v1(106.325,10.525) IC10.4@106.325,11.65 ; v1(107.675,3.05) C58.1@108.3,3.05 ; C123.1@118.782,12.088 v1(118.782,12.713) ; C122.1@119.782,12.088 v1(120.407,12.088) ; R84.1@119.912,13.238 v1(119.912,13.863) ; v1(121.912,12.613) R83.1@121.912,13.238 ; v1(95.05,13.225) IC7.33@95.3,12.975
  L1 w1: C94.2@80.636,73.036 C94.2@80.7,73.1 ; C95.2@83.2,73.1 C95.2@83.264,73.036 ; D16.1@92.95,84.1 D16.1@93.118,83.932
  L6 w0.3: C148.1@120.5,20.85 121.173,20.85 IC33.7@122.068,21.745 ; C128.1@120.5,38.45 121.173,38.45 IC29.7@122.068,39.345 ; IC26.3@121.907,1.766 IC26.3@122.068,1.605 ; C127.1@127.2,12.05 127.873,12.05 IC28.7@128.768,12.945 ; C149.1@127.2,29.65 127.873,29.65 IC34.7@128.768,30.545 ; C124.1@127.2,47.25 127.873,47.25 IC27.7@128.768,48.145
  L6 w1: J1A.16@12.732,6.918 12.732,5.586 13.318,5 13.425,5 13.5,4.925 C183A.2@13.5,4.6 ; J1A.15@12.732,9.458 12.732,10.914 13.318,11.5 13.425,11.5 13.5,11.575 C184A.2@13.5,11.9 ; J1B.16@12.732,51.368 12.732,50.036 13.318,49.45 13.425,49.45 13.5,49.375 C183B.2@13.5,49.05 ; J1B.15@12.732,53.908 12.732,55.364 13.318,55.95 13.425,55.95 13.5,56.025 C184B.2@13.5,56.35
  other v1: 118,0 123,0 90,1 71,4 80,4 95,5 95.5,5 55,5.55 58,5.55 118,7 93.6,7.2 34,7.55 38,7.55 41,7.55 44,7.55 48,7.55 60,7.55 60,10.55 75,11 5.5,11.5 44,11.55 93.725,11.875 96.4,11.9 132,12 82.5,12.3 80.675,12.325 81.6,13.225 25,13.55 60,13.55 82.525,14.125 80.7,14.15 50,14.55 93.7,14.55 96.375,14.575 41.7,15.2 40.05,15.25 104,15.9 40.9,16.05 105.6,16.2 25,16.55 32,16.55 34,16.55 36,16.55 60,16.55 41.75,16.85 40.1,16.9 12.7,17.5 99.1,17.8 99.1,18.4 6,18.55 52,18.55 99.1,19 56.75,19.225 92.1,19.35 79.1,19.4 10.5,19.5 16.5,19.5 56.75,19.875 57.4,19.875 132,20 79.1,20.1 63.55,20.25 55.45,20.525 56.1,20.525 56.75,20.525 36,20.55 79.1,20.8 55.45,21.175 56.1,21.175 56.75,21.175 64.556,21.256 6,21.55 54.15,21.825 54.8,21.825 55.45,21.825 56.1,21.825 56.75,21.825 85,22 54.15,22.475 54.8,22.475 57.4,22.475 51.5,22.5 13,22.55 34,22.55 48.1,22.9 42,23.55 10,24.5 15,24.55 25,25.55 41.7,26.2 40.05,26.25 83.9,26.5 84.5,26.5 85.1,26.5 17,26.55 22,26.55 30,26.55 53,26.55 8,27 40.9,27.05 41.75,27.85 40.1,27.9 132,28 34,28.55 41.1,30.6 87.925,31.075 48.6,31.5 89.9,31.7 90.5,31.7 102.644,37.216 103.3,37.2 101.989,37.232 8,38 18,38 132,38 9,46 132,46 55,50 58,50 34,52 38,52 41,52 44,52 48,52 60,52 76.966,52.973 135,53 72.936,53.044 76.966,53.473 72.936,53.544 72.017,53.68 72.017,54.18 60,55 5.5,56 44,56 115,56 104,57 122,57 25,58 60,58 92.8,58.1 92.8,58.9 50,59 41.7,59.65 40.05,59.7 40.9,60.5 25,61 32,61 34,61 36,61 60,61 41.75,61.3 40.1,61.35 92.8,61.5 92.8,62.3 16.5,62.5 6,63 52,63 99,63 56.75,63.675 13,64 78.7,64 56.75,64.325 57.4,64.325 63.55,64.7 78.7,64.7 55.45,64.975 56.1,64.975 56.75,64.975 10,65 36,65 78.7,65.4 55.45,65.625 56.1,65.625 56.75,65.625 64.556,65.706 6,66 78.7,66.1 54.15,66.275 54.8,66.275 55.45,66.275 56.1,66.275 56.75,66.275 78.7,66.8 54.15,66.925 54.8,66.925 57.4,66.925 13,67 34,67 78.7,67.5 8,68 42,68 15,69 25,70 41.7,70.65 40.05,70.7 17,71 22,71 30,71 53,71 40.9,71.5 11.1,71.825 80.2,71.9 80.9,71.9 81.6,71.9 82.3,71.9 83,71.9 83.7,71.9 56,72 41.75,72.3 11.1,72.325 40.1,72.35 11.1,72.825 34,73 91,73 11.1,73.325 11.1,73.825 11.1,74.325 11.1,74.825 50,75 11.1,75.325 11.1,75.825 40,76 11.1,76.325 11.1,76.825 76,77 11.1,77.325 11.1,77.825 8.8,80.425 65,81 34.675,81.75 35.975,81.75 95,82 74.768,82.175 35.318,82.625 74.768,82.675 22.732,83.087 24.032,83.087 74.768,83.175 34.661,83.5 35.961,83.5 74.768,83.675 94.4,83.7 23.375,83.962 45.057,84.025 46.357,84.025 56,84.1 57.3,84.1 74.768,84.175 94.4,84.5 74.768,84.675 22.718,84.838 24.018,84.838 45.7,84.9 56.643,84.975 74.768,85.175 45.043,85.775 46.343,85.775 55.986,85.85 57.286,85.85 94.4,87.1 72.468,87.775 94.4,87.9 12,88 35,88 85,90 95,90 19,91
GND_DIOT: B30.1 B31.1 B32.1 C1.1 C2.2 C56.1 C57.1 C59.1 C60.1 C119.1 C120.1 C121.1 C125.1 C126.1 C129.1 C133.1 C134.1 C147.1 C150.1 C151.1 C152.1 C153.1 C158.1 C159.1 C160.1 C161.1 C162.1 C163.2 C164.1 C165.1 C166.1 C167.1 C169.1 C170.1 C171.1 C173.1 C174.2 C179.1 C180.1 C181.1 C182.1 C219.1 C220.1 C298.1 C306.1 C307.1 D21.2 D23.2 D24.2 D27.2 FL1.4 IC9.1 IC9.3 IC11.5 IC12.5 IC13.5 IC26.7 IC27.2 IC27.3 IC27.4 IC28.2 IC28.3 IC28.4 IC29.2 IC29.3 IC29.4 IC33.2 IC33.3 IC33.4 IC34.2 IC34.3 IC34.4 IC36.3 IC36.4 IC36.11 IC37.4 IC37.5 IC37.6 IC38.2 IC40.7 IC41.3 IC41.4 IC41.5 IC41.7 IC42.1 IC43.2 IC44.1 IC44.2 IC44.3 IC44.4 IC45.2 IC46.1 IC46.2 IC46.3 IC46.4 J6.A2 J6.A4 J6.A6 J6.C1 J6.C5 J6.D2 J6.D4 J6.D6 J6.F1 J6.F5 J6.G2 J6.G4 J6.G6 J6.I1 J6.I5 J6.J2 J6.J4 J6.J6 J6.L1 J6.L5 J7.A2 J7.A4 J7.A6 J7.C1 J7.C3 J7.C5 J7.C7 J7.D2 J7.D4 J7.D6 J7.F1 J7.F3 J7.F5 J7.F7 J7.G2 J7.G4 J7.G6 J7.G8 J7.I1 J7.I3 J7.I5 J7.I7 J7.J2 J7.J4 J7.J6 J7.J8 J7.L1 J7.L3 J7.L5 J7.L7 J8.1 J8.4 J8.7 J8.10 J8.13 J8.16 J8.19 J8.22 J8.25 J9.1 J9.4 J9.7 J9.10 J9.13 J9.16 J9.19 J9.22 J9.25 L10.2 LD11.1 MOD2.1 MOD2.4 MOD2.7 MOD2.10 MOD2.13 MOD2.16 MOD2.19 MOD2.22 MOD2.25 MOD2.28 MOD2.31 MOD2.32 R31.2 R36.2 R85.1 R86.1 R91.1 R92.1 R93.1 R94.1 R99.1 R119.1 R120.1 R121.1 R129.1 R137.1 T1.2 T2.2 T18.2 T19.2 T20.2 T22.2 | length 272.5
  L1 w0.125: IC37.6@187.325,15.3 187.325,14.375 187.5,14.2 187.8,14.2 187.975,14.375 IC37.5@187.975,15.3 ; R137.1@187.77,16.9 187.77,16.43 187.975,16.225 IC37.5@187.975,15.3 ; v1(188.5,15.3) IC37.5@187.975,15.3
  L1 w0.15: LD11.1@-4.721,6.149 -1.549,6.149 v1(1.2,3.4) ; B31.1@170.4,10.9 171.2,10.1 v1(171.75,10.1) ; B30.1@177.3,67.9 178.537,69.137 178.537,69.412 v1(178.55,69.425) ; FL1.4@190.1,89.15 190.15,89.2 B32.1@193.1,89.2
  L1 w0.2: C2.2@5.55,-2 v1(6.18,-2) ; R31.2@6.5,-0.4 v1(7.23,-0.4) ; C56.1@152.4,62.85 152.85,62.85 153.065,63.065 IC9.3@154.1,63.065 ; v1(167.7,-1.65) T2.2@168.35,-1.65 ; v1(171.75,10.1) C182.1@172.5,10.1 ; v1(176.3,9.9) IC40.7@176.3,10.45 ; IC41.3@178.55,-1.2 v1(178.55,-0.2) ; IC41.4@179.2,-1.2 v1(179.2,-0.2) ; IC41.5@179.85,-1.2 v1(179.85,-0.2) ; IC41.7@181.15,-1.2 v1(181.15,-0.2) ; R129.1@181.5,81.9 v1(182.15,81.9) ; D27.2@183.1,25.5 v1(183.9,25.5) ; C179.1@186.1,8.7 v1(186.1,9.55) ; v1(187.05,1.1) T20.2@187.05,1.75 ; v1(187.05,4.6) T19.2@187.05,5.25 ; v1(190.8,-0.3) D24.2@191.6,-0.3 ; v1(190.8,2.5) D23.2@191.5,2.5 D23.2@191.6,2.5 ; IC44.4@199.8,16.695 v1(200.95,16.695) ; IC44.3@199.8,17.965 v1(200.95,17.965) ; IC44.2@199.8,19.235 v1(200.95,19.235) ; IC44.1@199.8,20.505 v1(200.95,20.505) ; IC46.4@199.8,22.295 v1(200.95,22.295) ; IC46.3@199.8,23.565 v1(200.95,23.565) ; IC46.2@199.8,24.835 v1(200.95,24.835) ; IC46.1@199.8,26.105 v1(200.95,26.105) ; IC43.2@207.2,17.6 v1(208.05,17.6) ; IC45.2@207.2,23.3 v1(208.05,23.3)
  L1 w0.3: v1(151.85,57.15) C57.1@152.4,57.15 ; v1(151.85,62.85) C56.1@152.4,62.85 ; IC11.5@154.1,59.905 v1(154.1,60.455) ; IC9.1@154.1,65.605 v1(154.1,66.155) ; IC13.5@158.2,54.205 v1(158.2,54.755) ; v1(159.15,48.35) C60.1@159.15,48.9 ; IC12.5@160.9,48.605 v1(160.9,49.155) ; v1(161.85,42.75) C59.1@161.85,43.3 ; C181.1@171.15,-2 v1(171.775,-2) ; v1(171.15,8.325) T1.2@171.15,8.95 ; v1(172.525,-2) C180.1@173.15,-2 ; v1(173.38,5.1) IC42.1@174.005,5.1 ; v1(175.175,4.25) C1.1@175.8,4.25 ; v1(177.5,74.625) C166.1@177.5,75.25 ; v1(178.55,69.425) T18.2@178.55,70.05 ; C298.1@181.25,15.8 v1(181.25,16.425) ; v1(183.975,15.25) C169.1@184.6,15.25 ; IC37.4@187.975,10.9 v1(188.5,10.9) ; IC38.2@192.3,8.3 v1(192.3,9.125) ; C173.1@192.9,6.6 v1(193.625,6.6) ; v1(193.6,12.075) C174.2@193.6,12.9 v1(193.6,13.725) ; C219.1@206.9,20.05 v1(207.525,20.05) ; C220.1@206.9,25.7 v1(207.525,25.7) ; v1(208.95,14.575) C306.1@208.95,15.2 ; v1(208.95,20.275) C307.1@208.95,20.9
  L1 w0.5: R36.2@67.85,-1.6 v1(68.6,-1.6)
  L4 w0.15: v1(1.2,3.4) 1.6,3.4 5,0 5,-2.4 5.8,-3.2 13.6,-3.2 15.4,-5 144.8,-5 145,-4.8 187.9,-4.8 190.8,-1.9 v1(190.8,-0.3)
  L6 w0.3: C151.1@144.4,14.05 v1(144.4,14.6) ; C147.1@144.4,31.65 v1(144.4,32.2) ; v1(145.45,11.45) C150.1@145.45,12 ; v1(145.45,29.05) C134.1@145.45,29.6 ; IC26.7@147.468,1.605 148.363,2.5 C121.1@149.036,2.5 ; R99.1@148.33,10.7 v1(148.33,11.25) ; R93.1@148.33,28.3 v1(148.33,28.85) ; R119.1@151.77,13.7 v1(151.77,14.25) ; R94.1@151.77,31.3 v1(151.77,31.85) ; v1(153.5,4.1) C129.1@153.5,4.65 ; v1(153.5,21.7) C152.1@153.5,22.25 ; v1(153.5,39.3) C125.1@153.5,39.85 ; v1(154.5,4.1) C133.1@154.5,4.65 ; v1(154.5,21.7) C153.1@154.5,22.25 ; v1(154.5,39.3) C126.1@154.5,39.85 ; R92.1@156.13,10.3 v1(156.13,10.85) ; R121.1@156.13,27.9 v1(156.13,28.45) ; R86.1@156.13,45.5 v1(156.13,46.05) ; v1(157.83,4.95) R91.1@157.83,5.5 ; v1(157.83,22.55) R120.1@157.83,23.1 ; v1(157.83,40.15) R85.1@157.83,40.7 ; v1(171.1,83.9) 171.7,84.5 171.8,84.5 171.95,84.65 T22.2@171.95,84.85
  other v1: 17,-2 27,-2 46,-2 59,-2 144,3 -3,4 144,10 -2,17 214,17 144,23 -2,24 189.2,27.012 189.2,28.461 184.4,31.5 -2,33 184.4,33 187,34 181.4,34.5 181.4,35.9 152,38 201.6,38.1 199.977,38.58 188.1,38.8 210,39 189.177,39.743 145,40 199.175,40.958 -2,42 215.413,43.003 203.043,43.028 209.235,43.016 187.3,44 185.9,44.5 203.241,45.658 215.413,45.797 209.464,45.81 198.7,46.3 200.3,46.3 213.551,48.5 215,48.5 -2,52 206.9,53.1 208.349,53.1 200.4,54.8 206.7,54.825 151,55 200.4,56.1 206.7,56.275 202.579,58.204 -2,59 215,59 203.722,59.474 151,60 215,69 171.4,69.6 165,70 171.4,70.3 -2,71 171.4,71 172.5,71.2 166.9,71.3 166.9,72 166.9,72.7 167.5,73.3 167.7,74 167.7,74.7 181.9,76.6 182.6,76.6 179.7,77.4 166,79 180,79.6 -2,80 179.5,80.3 180.2,80.3 191.4,82.2 186.3,83.3 186.3,84 184.4,84.1 191.3,84.3 184.4,84.8 185.1,84.8 185.8,84.8 185.8,85.6 169,86 189.2,86.7 191.4,86.7 169,90 171.25,90.37 171.95,90.37 172.65,90.37 173.7,90.4 174.4,90.4 175.1,90.4 3,91
GND_LLC: C130.2 C131.2 C135.2 C136.1 C141.2 C142.1 C143.1 C144.1 C168.1 D8.2 IC30.10 IC31.3 L10.3 P1.1 R105.1 R110.1 R111.1 R112.1 R113.1 SW1.1 | length 7.7
  L1 w0.2: v1(147.6,77.6) R110.1@148.3,77.6 ; v1(148.3,78.6) C143.1@148.3,79.3 ; v1(149.45,74.45) P1.1@150.45,74.45 ; v1(149.9,78.6) R112.1@149.9,79.3 ; v1(151.4,78.65) C142.1@151.4,79.35 ; D8.2@154.8,75.7 v1(155.5,75.7) ; C144.1@156.5,79.5 v1(157.2,79.5) ; R113.1@156.5,81.1 v1(157.2,81.1) ; v1(158.4,81.4) R111.1@159.1,81.4
  L6 w0.3: v1(148.05,85.75) C141.2@148.6,85.75 ; C136.1@155.35,90 v1(155.9,90)
  other v1: 146,65 154,70 133,77 144,78 162,78 147,80.7 129,81 147,81.4 147,82.1 147,82.8 147,83.5 135.3,84.9 136,84.9 134.7,85.1 136.6,85.1 136.6,85.7 125,86 125,91
I2C_SCL1: D27.6 IC45.1 IC46.6 J9.27 | length 49.5
  L1 w0.125: J9.27@173.017,23.527 174.34,24.85 D27.6@180.9,24.85 ; IC46.6@205.2,23.565 205.675,23.565 205.912,23.802 205.912,23.812 206.35,24.25 IC45.1@207.2,24.25
  L1 w0.2: v1(204.05,23.565) IC46.6@205.2,23.565
  L6 w0.125: J9.27@173.017,23.527 174.3,24.81 174.3,26.6 175.1,27.4 184.266,27.4 185.366,26.3 189.5,26.3 190.7,27.5 202.4,27.5 204.05,25.85 v1(204.05,23.565)
I2C_SDA1: D27.4 IC45.3 IC46.5 J9.26 | length 42.1
  L1 w0.125: J9.26@175.557,26.067 177.967,26.067 178.05,26.15 D27.4@180.9,26.15 ; IC46.5@205.2,22.295 207.145,22.295 IC45.3@207.2,22.35
  L1 w0.2: v1(204.05,22.295) IC46.5@205.2,22.295
  L6 w0.125: J9.26@175.557,26.067 177.967,26.067 178.9,27 184.1,27 185.2,25.9 189.7,25.9 191,27.2 194.9,27.2 195.2,26.9 202.3,26.9 203.5,25.7 203.5,22.845 v1(204.05,22.295)
LLC_CF: C142.2 IC30.3 | length 2.3
  L1 w0.3: IC30.3@151.095,82.975 151.1,82.97 151.1,82 151.4,81.7 C142.2@151.4,80.85
LLC_Css: C141.1 IC30.1 R106.1 | length 3.8
  L1 w0.3: IC30.1@148.555,82.975 v1(148.555,84.045)
  L6 w0.3: C141.1@148.6,84.85 148.555,84.805 v1(148.555,84.045) 149.345,84.045 149.75,84.45 149.8,84.45 150.1,84.75 R106.1@150.1,84.8
LLC_Delay: C143.2 IC30.2 R112.2 | length 3.7
  L1 w0.3: C143.2@148.3,80.9 R112.2@149.9,80.9 149.9,81.7 149.8,81.8 149.8,82.95 IC30.2@149.825,82.975
LLC_DIS: IC30.8 R111.2 | length 1.7
  L1 w0.3: IC30.8@157.445,82.975 159.075,82.975 R111.2@159.1,83
LLC_HVG: D1.1 IC30.15 R100.1 | length 7.8
  L1 w0.5: R100.1@144.8,85.1 144.8,85.8 145.3,86.3 D1.1@145.3,86.9 149.4,86.9 149.825,87.325 IC30.15@149.825,88.425
LLC_ISEN: C144.2 D7.1 IC30.6 R104.2 R113.2 | length 19.2
  L1 w0.2: R104.2@141.3,79.2 v1(142,79.2)
  L1 w0.3: D7.1@154.8,77.7 154.8,78.5 154.9,78.6 v1(154.9,78.8) C144.2@154.9,79.5 R113.2@154.9,81.1 154.905,81.105 IC30.6@154.905,82.975
  L6 w0.2: v1(142,79.2) 144.1,79.2 144.3,79.4 153.7,79.4 154.3,78.8 v1(154.9,78.8)
LLC_LVG: D4.1 IC30.11 R103.1 | length 14.4
  L1 w0.5: D4.1@145.3,88.9 145.22,88.9 145.22,89.58 144.955,89.845 144.955,90.545 R103.1@144.8,90.7 146.8,90.7 147.1,91 154.2,91 154.905,90.295 IC30.11@154.905,88.425
LLC_OUT: C132.1 IC30.14 T7.1 T7.5 T7.6 Tr1.1 | length 5
  L1 w0.6: T7.1@139.6,86.3 v1(141.095,86.3) ; C132.1@150.25,90.1 151.095,89.255 IC30.14@151.095,88.425 151.095,86.905 v1(151.1,86.9)
  other v1: 140.547,86.3 151.1,87.4
LLC_RFmin: C138.2 IC30.4 IC31.4 R106.2 R107.2 R108.2 | length 23.2
  L1 w0.2: IC31.4@145.355,69.43 150.63,69.43 151.5,70.3 151.5,75 151.8,75.3 152.9,75.3 153.1,75.5 153.1,76.05 153.07,76.08 R108.2@153.07,76.1 153.07,76.73 153,76.8 C138.2@153,77.6 153,78.4 153.3,78.7 R107.2@153.3,79.3 153.25,79.3 152.9,79.65 152.9,79.7 152.365,80.235 IC30.4@152.365,82.975
  L1 w0.3: v1(152.352,83.948) 152.352,82.988 IC30.4@152.365,82.975
  L6 w0.3: R106.2@151.7,84.8 151.7,84.75 152,84.45 152.05,84.45 152.333,84.167 152.333,83.967 v1(152.352,83.948)
LLC_STBY: IC30.5 R107.1 | length 2.2
  L1 w0.2: R107.1@153.3,80.9 153.3,81.7 153.635,82.035 IC30.5@153.635,82.975
LLC_VCC: C135.1 C136.2 IC30.12 R101.1 R102.1 | length 3
  L1 w0.6: IC30.12@153.635,88.425 153.635,89.735 v1(153.9,90)
  L6 w0.3: R102.1@153.6,86.17 v1(153.6,86.9) ; v1(153.9,90) C136.2@154.45,90
LNA_MISOA: B8.1 IC8.4 J1A.2 J1B.2 R81.2 | length 154
  L1 w0.125: B8.1@30.5,45.5 v1(30.5,47) ; IC8.4@81.35,15.1 v1(81.35,16.15) ; v1(104.5,9) 105.1,8.4 114.8,8.4 117.9,11.5 117.9,13.4 118.9,14.4 120.8,14.4 120.962,14.238 R81.2@121.912,14.238
  L3 w0.125: J1A.2@30.512,6.918 36.318,6.918 42.1,12.7 72.6,12.7 76.8,16.9 80.6,16.9 v1(81.35,16.15) 83.8,13.7 101.6,13.7 103,12.3 103,9.9 103.9,9 v1(104.5,9)
  L6 w0.125: J1A.2@30.512,6.918 29.28,8.15 29.28,14.32 27.1,16.5 27.1,41.3 29.7,43.9 29.7,46.2 30.512,47.012 J1B.2@30.512,51.368
LT3045_P5V0: C77.2 C78.2 IC16.10 IC16.11 IC16.12 L7.1 R38.2 | length 9.8
  L1 w0.3: R38.2@19.305,86.962 17.475,86.962 16.675,86.162 16.675,83.962 17,83.637 IC16.10@21.175,83.637
LT3094_N5V0: C98.2 C99.2 IC20.10 IC20.11 IC20.12 L8.1
N5V0: B23.1 C12A.2 C12B.2 C13A.2 C13B.2 C14A.2 C14B.2 C21A.2 C21B.2 C23A.2 C23B.2 C24A.2 C24B.2 C25A.2 C25B.2 C96.1 C100.2 IC2A.2 IC2B.2 IC3A.4 IC3A.5 IC3B.4 IC3B.5 IC4A.14 IC4A.15 IC4A.17 IC4B.14 IC4B.15 IC4B.17 IC5A.4 IC5A.5 IC5B.4 IC5B.5 IC6A.2 IC6B.2 L8.2 R45.2 | length 33.9
  L1 w0.2: C21A.2@29.85,24.25 v1(29.85,24.8) ; C21B.2@29.85,68.7 v1(29.85,69.25)
  L1 w0.25: C21A.2@29.9,24.1 29.9,23.15 ; C21B.2@29.9,68.55 29.9,67.6 ; 29.9,23.15 30.15,22.9 IC4A.14@30.15,22.275 30.15,21.1 IC4A.17@29.9,20.85 29.65,21.1 IC4A.15@29.65,22.275 29.65,22.9 29.9,23.15 ; 29.9,67.6 29.65,67.35 IC4B.15@29.65,66.725 29.65,65.55 IC4B.17@29.9,65.3 30.15,65.55 IC4B.14@30.15,66.725 30.15,67.35 29.9,67.6
  L1 w0.4: B23.1@5.8,69.3 5.8,70.4 v1(6.3,70.9) ; v1(7.9,82.7) 8.8,83.6 14.2,83.6 14.85,82.95 R45.2@14.85,82.225
  L6 w0.4: v1(7,72.3) 7,81.8 v1(7.9,82.7)
  other v1: 37.8,10.458 37.8,10.958 37.8,11.458 18.486,18.987 18.486,19.687 19.186,19.687 37.8,21.458 37.8,21.958 37.8,22.458 18.486,25.787 18.486,26.487 19.186,26.487 37.8,54.908 37.8,55.408 37.8,55.908 18.486,63.437 18.486,64.137 19.186,64.137 37.8,65.908 37.8,66.408 37.8,66.908 18.486,70.237 18.486,70.937 19.186,70.937 6.3,71.6 6.3,72.3
N5V0_ILIM: IC20.6 R58.2 | length 1.3
  L1 w0.2: R58.2@12.67,82.725 12.7,82.695 IC20.6@12.7,81.45
N5V0_SET: C108.2 IC20.8 R59.2 R60.2 | length 3.8
  L1 w0.2: R59.2@6.1,81.375 C108.2@8.1,81.375 8.75,81.375 9.125,81 IC20.8@9.7,81